# Altium PCB Orin PCB.PcbDoc
Units mil, origin at the board's own origin, x right, y up, seen from the top; angles counter-clockwise.
Board outline 2559.06 x 1811.42 mil, 2 copper layers (Top Layer, Bottom Layer); 20 components, 17 nets, 112 pads, 12 vias.
Unrouted connection lines stored in the file: 6.
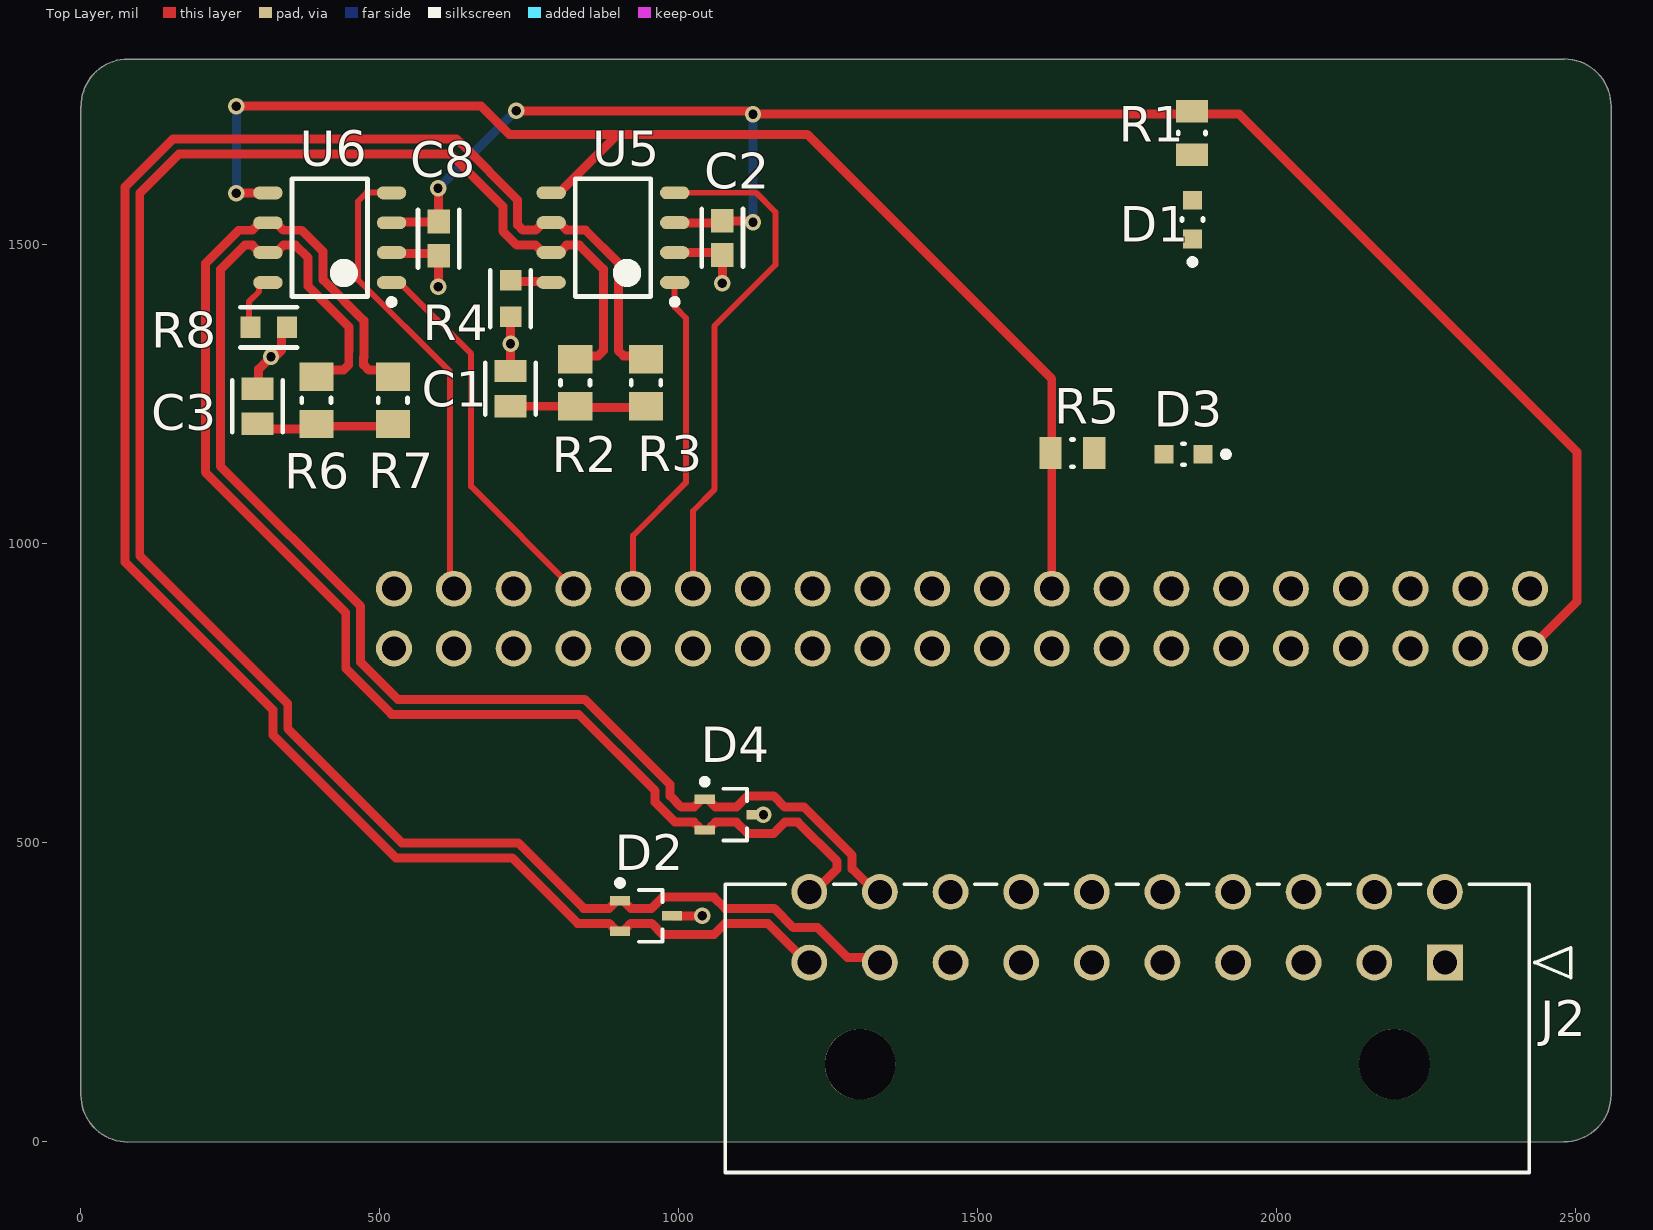
[diagram p0: Top Layer view]
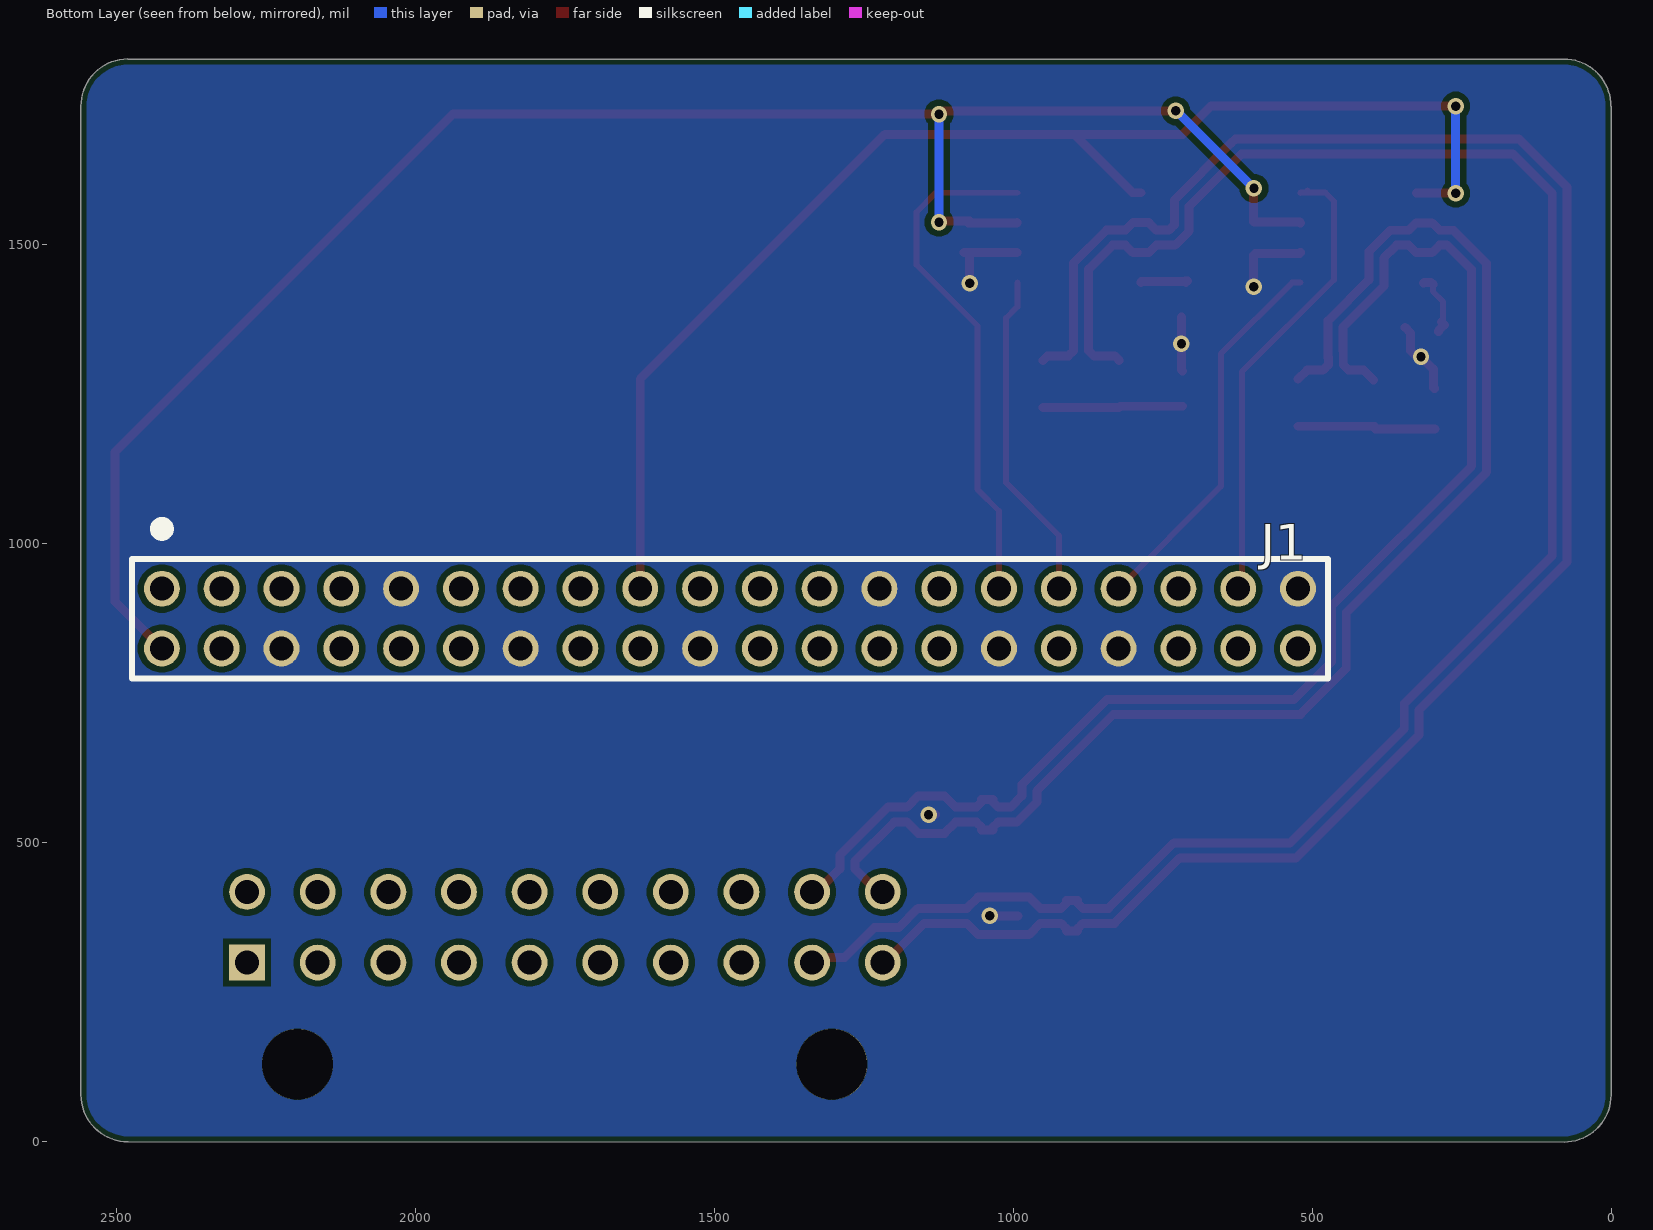
[diagram p1: Bottom Layer view, seen from below]
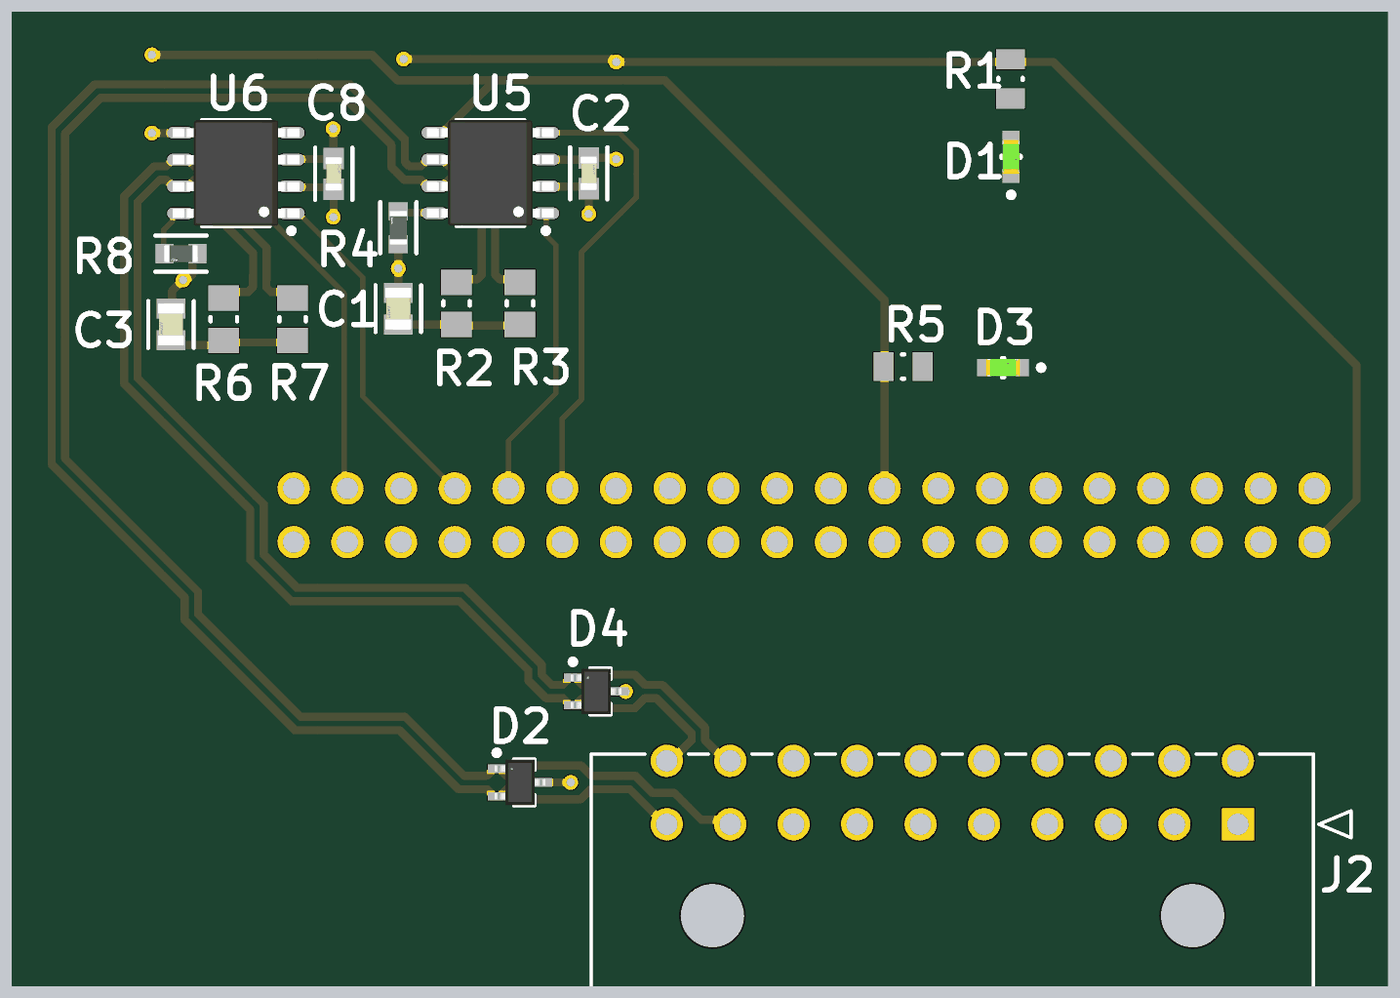
[diagram p2: 3D render of the assembled board from above, using the file's embedded part models]

## Layer stack, top to bottom
Top Solder: solder mask 0.4, Solder Resist, Dk 3.5
Top Layer: signal copper 1.4
Dielectric 1: dielectric 12.6, FR-4, Dk 4.8
Bottom Layer: signal copper 1.4
Bottom Solder: solder mask 0.4, Solder Resist, Dk 3.5

## Board outline
78.52,-0.22 cw(c78.74,78.52) 0,78.74 0,1732.1 0.18,1732.1 cw(c78.92,1732.28) 78.74,1811.02 2480.68,1811.02 2480.68,1811.2 cw(c2480.25,1732.46) 2558.99,1732.04 2559.05,1732.04 2559.06,78.74 cw(c2480.32,78.96) 2480.1,0.22 2480.1,0

## Design rules (kind name [scope] priority, off if disabled: settings)
Clearance Keepout [IsKeepOut] p1: gap=0 ignorepadtopadclearanceinfootprint=FALSE
Clearance [All] p2: gap=10 ignorepadtopadclearanceinfootprint=FALSE except(0: Arc-Text Track-Text SMDPad-Hole THPad-Hole Via-Text Via-Hole Fill-Text Fill-Hole Poly-Text Poly-Hole Region-Text Region-Hole Text-Text Text-Hole; 5: Arc-Arc Arc-Track Track-Track SMDPad-SMDPad SMDPad-Fill SMDPad-Poly SMDPad-Region; 5.91: SMDPad-Text THPad-Text; 7.87: Arc-SMDPad Track-SMDPad; 12.99: Arc-Hole Track-Hole; 19.68: THPad-THPad)
DiffPairsRouting [All] p1: maxlimit=10 minlimit=10 mostfreqgap=10 toplayer_minwidth=15 toplayer_maxwidth=15 toplayer_prefwidth=15 bottomlayer_minwidth=15 bottomlayer_maxwidth=15 bottomlayer_prefwidth=15 maxuncoupledlength=500
DiffPairsRouting CAN [InDifferentialPairClass('CAN')] p2: maxlimit=15 minlimit=15 mostfreqgap=15 toplayer_minwidth=10 toplayer_maxwidth=10 toplayer_prefwidth=10 bottomlayer_minwidth=10 bottomlayer_maxwidth=10 bottomlayer_prefwidth=10 maxuncoupledlength=500
HoleSize [All] p1: absolutevalues=TRUE maxlimit=248.03 minlimit=11.81 maxpercent=80.000 minpercent=20.000
HoleToHoleClearance [All] p1: gap=19.68 allowstackedmicrovias=TRUE
MatchedLengths [InDifferentialPair('CAN')] p1: tolerance=1000 checknetsindiffpair=TRUE checkdiffpairvsdiffpair=FALSE checkxsignals=FALSE checkothers=FALSE
MinimumAnnularRing [All] p1: minimumring=5.12
MinimumSolderMaskSliver [All] p1: minsoldermaskwidth=3.94
PlaneConnect [All] p1: planeconnectstyle=Direct reliefexpansion=20 reliefentries=4 reliefconductorwidth=10 reliefairgap=10
PolygonConnect [All] p1: connectstyle=Direct reliefconductorwidth=50 reliefentries=4 polygonreliefangle="90 Angle" airgapwidth=10
RoutingVias [All] p1: holewidth=15.75 width=27.56 viastyle="Through Hole" minholewidth=11.81 minwidth=19.68 maxholewidth=28 maxwidth=50
SilkToSilkClearance [All] p1: silktosilkclearance=5.91
SilkToSolderMaskClearance [IsPad] p1: minsilkscreentomaskgap=5.91 clearancetoexposedcopper=TRUE
SolderMaskExpansion [All] p1: expansion=1.97 istentingtop=FALSE
SupplyNets "Schematic Supply Nets_3" [InNet('3V3_ORIN')] p1: voltage=0.000
SupplyNets "Schematic Supply Nets_2" [InNet('GND')] p2: voltage=0.000
SupplyNets "Schematic Supply Nets" [InNet('5V_ORIN')] p3: voltage=0.000
UnRoutedNet [All] p1: checkbadconnections=TRUE
Width [All] p1: maxlimit=3937.01 minlimit=5 preferedwidth=10
22 further rules are at their usual default settings.

## Classes and differential pairs
differential pair class CAN2: CAN2
differential pair class CAN1: CAN1
differential pair CAN2: +CAN2_P -CAN2_N
differential pair CAN1: +CAN1_P -CAN1_N

## Components (designator, comment, footprint, x,y, rotation, side; value= is the part's Value field where it differs from the comment)
C1 "C0805C102K5RACTU" FP-C0805C-DN-MFG 718.5,1259.84 r90 top value=1nF
C2 "C0603C104K5RACAUTO" FP-C0603C-CF-IPC_B 1072.83,1511.81 r270 top value=100nF
C3 "C0805C102K5RACTU" FP-C0805C-DN-MFG 295.28,1230.32 r90 top value=1nF
C8 "C0603C104K5RACAUTO" FP-C0603C-CF-IPC_B 598.24,1510.79 r270 top value=100nF
D1 "APT1608ZGCK" FP-APT1608ZGCK-MFG 1859,1542.48 r90 top
D2 "ESD2CAN24DCKRQ1" SOT65P210X110-3N 944.88,377.95 r0 top
D3 "APT1608ZGCK" FP-APT1608ZGCK-MFG 1844,1150 r180 top
D4 "ESD2CAN24DCKRQ1" SOT65P210X110-3N 1086.61,547.24 r0 top
J1 "ESQ-120-48-G-D-LL" ESQ-120-48-G-D-LL-Footprint-1 1523.62,825.2 r180 bottom
J2 "430452000" CON_430452000_MOL 2281.1,300 r0 top
R1 "RC0805JR-7W220RL" RESC2012X06N 1858,1687.42 r270 top value=220R
R2 "RC0805FR-0760R4L" RESC2013X60X35ML10T20 826.77,1269.68 r90 top value=60R
R3 "RC0805FR-0760R4L" RESC2013X60X35ML10T20 944.88,1269.68 r270 top value=60R
R4 "RC0603FR-0710KL" FP-RC0603-0_55-IPC_B 718.5,1410.43 r90 top
R5 "RC0805JR-7W220RL" RESC2012X06N 1658,1152 r0 top value=220R
R6 "RC0805FR-0760R4L" RESC2013X60X35ML10T20 393.7,1240.16 r90 top value=60R
R7 "RC0805FR-0760R4L" RESC2013X60X35ML10T20 521.65,1240.16 r270 top value=60R
R8 "RC0603FR-0710KL" FP-RC0603-0_55-IPC_B 313.98,1362.2 r180 top
U5 "TJA1051T/3,118" NXP-SOIC-8_L 889.76,1512.37 r180 top
U6 "TJA1051T/3,118" NXP-SOIC-8_L 416.15,1512.17 r180 top

## Footprints (in the part's own frame and the unit in brackets; to place one, negate y for a bottom-side part, rotate by r counter-clockwise, add the part's x,y. Pads: shape width x height; smd on the part's side, far side on the other; paste and mask are expansions set on the pad)
CON_430452000_MOL [mm]
  rect 1.52x1.52 / inner round 1.524 / far side rect 1.52x1.52 hole 1.02 paste-2539.97 mask+0.076: 1(0,0)
  round 1.52 / inner round 1.524 / far side round 1.52 hole 1.02 paste-2539.97 mask+0.076: 2(-3,0) 3(-6,0) 4(-9,0) 5(-12,0) 6(-15,0) 7(-18,0) 8(-21,0) 9(-24,0) 10(-27,0) 11(0,3) 12(-3,3) 13(-6,3) 14(-9,3) 15(-12,3) 16(-15,3) 17(-18,3) 18(-21,3) 19(-24,3) 20(-27,3)
  round 3 / inner round 1.524 / far side round 3 hole 3 unplated paste-2539.97 mask+0.076: M1(-2.14,-4.32) M2(-24.84,-4.32)
  silkscreen extent -30.57,-8.92 5.35,3.32
ESQ-120-48-G-D-LL-Footprint-1 [mil]
  round 60 hole 40: 1(-900,100) 2(-900,0) 3(-800,100) 4(-800,0) 5(-700,100) 6(-700,0) 7(-600,100) 8(-600,0) 9(-500,100) 10(-500,0) 11(-400,100) 12(-400,0) 13(-300,100) 14(-300,0) 15(-200,100) 16(-200,0) 17(-100,100) 18(-100,0) 19(0,100) 20(0,0) 21(100,100) 22(100,0) 23(200,100) 24(200,0) 25(300,100) 26(300,0) 27(400,100) 28(400,0) 29(500,100) 30(500,0) 31(600,100) 32(600,0) 33(700,100) 34(700,0) 35(800,100) 36(800,0) 37(900,100) 38(900,0) 39(1000,100) 40(1000,0)
  silkscreen extent -950,-50 1050,210
FP-APT1608ZGCK-MFG [mm]
  rect 0.8x0.8 smd paste+0 mask+0: 1(-0.825,0) 2(0.825,0)
  silkscreen extent -1.92,-0.45 0.05,0.45, body extent -1.33,-0.55 1.33,0.55, height 0.25
FP-C0603C-CF-IPC_B [mil]
  rect 39.63x37.73 smd paste+0 mask+0: 1(-28.58,0) 2(28.58,0)
  silkscreen extent -48,-35 48,35, body extent -58,-29 58,29, height 10
FP-C0805C-DN-MFG [mm]
  rect 0.95x1.35 smd paste+0 mask+0: 1(-0.75,0) 2(0.75,0)
  silkscreen extent -1.1,-1.07 1.1,1.07, body extent -1.4,-0.85 1.4,0.85, height 0.25
FP-RC0603-0_55-IPC_B [mil]
  rect 33.81x35.91 smd paste+0 mask+0: 1(-30.58,0) 2(30.58,0)
  silkscreen extent -47,-34 47,34, body extent -57,-28 57,28, height 10
NXP-SOIC-8_L [mm] "SOIC, 8-Leads, Body 5x4mm, Pitch 1.27mm, IPC High Density"
  oval 1.25x0.55 smd: 1(-2.625,1.905) 2(-2.625,0.635) 3(-2.625,-0.635) 4(-2.625,-1.905) 5(2.625,-1.905) 6(2.625,-0.635) 7(2.625,0.635) 8(2.625,1.905)
  silkscreen extent -2.75,-2.5 1.6,2.85, body extent -3,-2.5 3,2.5, height 1.75
RESC2012X06N [mm] "Chip Resistor, 2-Leads, Body 2.00x1.25mm, IPC Medium Density"
  rect 0.95x1.35 smd: 1(-0.925,0) 2(0.925,0)
  silkscreen extent -0.05,-0.58 0.05,0.58, body extent -1.05,-0.67 1.05,0.67, height 0.6
RESC2013X60X35ML10T20 [mm] "Chip Resistor, 2-Leads, Body 2.00x1.25mm, IPC Low Density"
  rect 1.2x1.45 smd: 1(-1,0) 2(1,0)
  silkscreen extent -0.1,-0.63 0.1,0.63, body extent -1.05,-0.67 1.05,0.67, height 0.6
SOT65P210X110-3N [mm] "SOT23, 3-Leads, Body 2.00x2.10mm, Pitch 0.65mm, IPC Medium Density"
  rect 0.85x0.4 smd: 1(-1.1,0.65) 2(-1.1,-0.65) 3(1.1,0)
  silkscreen extent -1.22,-1.1 0.7,1.52, body extent -1.19,-1.08 1.19,1.08, height 1.09

## Part data
C1 C3: library part CMP-2007-01097-2, "CAP CER 1000PF 50V X7R 0805", Capacitance="1,000 pF", Manufacturer=KEMET, Package=C0805C-DN, Temperature="-55°C to +125°C", Temperature Characteristic=X7R, Temperature Coefficient=30ppm/°C, Temperature Range High=+125°C, Temperature Range Low=-55°C, Tolerance=0.1, Voltage Rating="50 V", Automotive=No, Category=Cap, ComponentLink2Description=Datasheet, ComponentLink2URL=https://content.kemet.com/datasheets/KEM_C1003_C0G_SMD.pdf, Device Class L1="Passive Components", Device Class L2=Capacitors, Device Class L3="Ceramic Capacitors", Digikey Description="CAP CER 1000PF 50V X7R 0805", Height=0.88mm, Ipc Land Pattern Name=CAPC200125X78, Lead Free=Yes, Manufacturer Part Number=C0805C102K5RACTU, Material=Ceramic, Mouser Description="Cap Ceramic 0.001uF 50V X7R 10% SMD 0805 125C Plastic T/R", Octopart=https://octopart.com/c0805c102k5ractu-kemet-93010, RoHS=TRUE
C2 C8: library part CMP-2006-03060-2, "CAP CER 0.1UF 50V X7R 0603", Capacitance="0.10 μF", Manufacturer=KEMET, Package=C0603C-CF, Temperature="-55°C to +125°C", Temperature Characteristic=X7R, Temperature Coefficient=30ppm/°C, Temperature Range High=+125°C, Temperature Range Low=-55°C, Tolerance=0.1, Voltage Rating="50 V", Automotive=Yes, Automotive Grade="Grade 1", Category=Cap, ComponentLink2Description=Datasheet, ComponentLink2URL=https://api.kemet.com/component-edge/download/datasheet/C0603C100J5GACAUTO.pdf, Device Class L1="Passive Components", Device Class L2=Capacitors, Device Class L3="Ceramic Capacitors", Digikey Description="CAP CER 0.1UF 50V X7R 0603", Height=0.87mm, Lead Free=Yes, Manufacturer Part Number=C0603C104K5RACAUTO, Material=Ceramic, Mouser Description="Multilayer Ceramic Capacitors MLCC - SMD/SMT 0.1uF 50volts 10% X7R AUTO", Octopart=https://octopart.com/c0603c104k5racauto-kemet-12563741, RoHS=TRUE
D1 D3: library part CMP-44529-000024-1, "LED GREEN CLEAR CHIP SMD", Case Code (Imperial)=0603, Case Code (Metric)=1608, Color=Green, Forward Current=20mA, Forward Voltage=3.3V, Lens Color=Colorless, Max Operating Temperature=85°C, Min Operating Temperature=-40°C, Package Quantity=1, Case/Package=0603, Dominant Wavelength=525nm, Height=0.75mm, Illumination Color=Green, Lead Free="Lead Free", Length=1.6mm, Lens Transparency=Clear, Luminous Intensity=350mcd, Mount="Surface Mount", Packaging="Tape and Reel", Test Current=20mA, Viewing Angle=120°, Width=0.8mm
D2 D4: library part CMP-004-00032-2, "Automotive, dual, 3-pF, ±24-V, ±30-kV ESD protection diode for CAN and in-vehicle networks 3-SC70 -55 to 150"
J1: library part CMP-002-00083-4, "Board Connector, 40 Contact(s), 2 Row(s), Female, Straight, 0.1 inch Pitch, Solder Kinked Leads Terminal, Locking, Black Insulator, Plug"
J2: "No Description Available", Mfr_Name="Molex Connector Corporation", RefDes=RefDes, Type=Type
R1 R5: library part CMP-009-00188-1, "General Purpose Chip Resistor Thick Film 0805 220Ohm 5% Paper T/R"
R2 R3 R6 R7: library part CMP-2001-01223-1, Manufacturer=Yageo, Part Number=RC0805FR-0760R4L
R4 R8: library part CMP-2100-03664-2, "RES 10K OHM 1% 1/10W 0603", Case Code (Imperial)=0603, Case Code (Metric)=1608, Max Operating Temperature=155°C, Max Power Dissipation=100mW, Min Operating Temperature=-55°C, Resistance=10k, Resistance Tolerance=1%, Resistor Type="Thick Film", Temperature Coefficient=100ppm/°C, Voltage Rating=75V, Voltage Rating (DC)=50V, Case/Package=0603, Construction=Rectangular, Depth=0.8mm, Features="Moisture Resistant", Height=0.45mm, Lead Free="Lead Free", Lead Pitch=0.3mm, Length=1.6mm, Military Standard=Not, Number of Pins=2, Number of Terminations=2, Packaging="Tape and Reel", Power Rating=100mW, RoHS Compliant=Yes, Series=RC, Size Code=0603, Termination=SMD/SMT, Tolerance=1%, Weight=7.1E-05oz, Width=0.8mm
U5 U6: library part CMP-2000-07245-1, "High-Speed CAN Transceiver, 3 to 5 V, 8-Pin SOIC (SOT96-1), RoHS, Tape and Reel", Manufacturer=NXP, Operating Supply Voltage (Max)=5.5V, Operating Supply Voltage (Min)=4.5V, Operating Supply Voltage (Typ)=5V, Operating Temperature (Max)=125C, Operating Temperature (Min)=-40C, Operating Temperature Classification=Automotive, Package Description="8-Pin Small Outline Integrated Circuit, Body 4.9 x 3.9 mm, Pitch 1.27 mm", Package Reference=SOT96-1, Package Type=SO, Power Down Mode=Normal/Silent, Supply Current=70mA, Category=Transceiver, Data Rate=1Mbps, Datasheet URL=http://www.nxp.com/documents/data_sheet/TJA1051.pdf, Datasheet Version="Rev. 7, 01/2015", DELETED=Compliant, Manufacturer URL=http://www.nxp.com/, Mounting=SurfaceMount, Mounting Technology=SurfaceMount, Number of Transceivers=1, Packaging=TapeandReel, Pin Count=8, Rad Hardened=No, Standard Supported=ISO11898-2

## Via types
v1: diameter 27.56, hole 15.75, Top Layer to Bottom Layer, 12 vias

## Nets (pads, with @x,y where several pads share a name; then routed paths per layer and width w, separated by ;. In a path a pad name is that pad's centre, name@x,y a point inside that pad or via, vN(x,y) a via of type N, cw(c..) or ccw(c..) an arc to the next point about the centre after c; other vN are vias at no path point)
3V3_ORIN: J1.1 J1.17 R5.1 U5.5 U6.5 | length 2260
  Top Layer w15: v1(259.84,1586.61) U6.5@325.35,1586.61 ; v1(259.84,1732.28) 669.29,1732.28 716.54,1685.04 897.87,1685.04 ; U5.5 800.2,1587.37 897.87,1685.04 ; J1.17@1624,932 1623.62,932.38 1623.62,1275.98 1214.57,1685.04 897.87,1685.04
  Bottom Layer w15: v1(259.84,1586.61) v1(259.84,1732.28)
5V_ORIN: C2.1 C8.1 J1.2 J1.4 R1.1 U5.3 U6.3 | length 3018
  Top Layer w15: U6.3 520.6,1538.27 C8.1@597.14,1538.27 ; v1@597.25,1591.58 v1(597.25,1594.84) 597.75,1594.35 597.75,1539.86 C8.1 ; v1@728.64,1724.7 v1(728.35,1724.41) 1115.19,1724.41 1118.6,1721 v1@1124,1721 ; U5.3 993.57,1536.91 C2.1@1074.8,1536.91 ; C2.1 1121.61,1540.39 v1(1124,1538) ; v1@1122,1723 v1@1124,1721 ; v1(1124,1719) v1@1124,1721 ; v1@1124,1721.11 v1@1124,1721 ; v1@1125,1721 v1@1124,1721 ; J1.2 2502,903.57 2502,1154 1937,1719 1126,1719 v1@1124,1721
  Bottom Layer w15: v1(597.25,1594.84) 598.02,1594.84 727.58,1724.41 v1(728.35,1724.41) v1@725.94,1722.01 ; v1(1124,1538) v1(1124,1719)
CAN1_N: D2.2 J2.10 R3.1 U5.6 | length 3288.2
  Top Layer w15: R3.1@949.8,1307.09 942.41,1314.48 907.61,1314.48 898.82,1323.27 898.82,1469.93 843.88,1524.87 812.31,1524.87 799.81,1537.37 U5.6 773.02,1537.37 760.52,1524.87 739.31,1524.87 730.52,1533.65 730.52,1575.11 635.79,1669.84 628.47,1677.17 153.62,1677.17 73.43,1596.97 73.43,969.96 320.91,722.48 320.91,680.63 526.53,475 720.99,475 830.54,365.45 883.56,365.45 892.34,356.67 892.34,352.74 892.72,352.36 D2.2 910.43,352.36 910.81,352.74 910.81,356.67 919.59,365.45 954.34,365.45 973.12,346.67 1058.58,346.67 1077.36,365.45 1148.9,365.45 1205.77,308.58 1209.53,308.58 J2.10
CAN1_P: D2.1 J2.9 R2.2 U5.7 | length 3292.4
  Top Layer w15: R2.2@822.83,1307.09 830.23,1314.48 865.03,1314.48 873.82,1323.27 873.82,1459.57 833.52,1499.87 812.31,1499.87 799.81,1487.37 U5.7 773.02,1487.37 760.52,1499.87 728.96,1499.87 705.52,1523.3 705.52,1564.75 618.11,1652.17 163.98,1652.17 98.43,1586.61 98.43,980.32 338.58,740.16 345.91,732.84 345.91,690.98 536.89,500 731.35,500 840.9,390.45 883.56,390.45 892.34,399.24 892.34,403.17 892.72,403.54 D2.1 910.43,403.54 910.81,403.17 910.81,399.24 919.59,390.45 954.34,390.45 973.12,409.23 1058.58,409.23 1077.36,390.45 1159.25,390.45 1191.44,358.27 1232.28,358.27 1281.97,308.58 1327.64,308.58 J2.9
CAN1_RX: J1.29 U5.4 | length 868
  Top Layer w10: U5.4 1129.17,1587.37 1161.42,1555.12 1161.42,1466.54 1059.35,1364.47 1059.35,1090.85 1023.62,1055.12 1023.62,926.38 J1.29@1024,926
CAN1_TX: J1.31 U5.1 | length 556.4
  Top Layer w10: J1.31 923.62,1014.17 1011.81,1102.36 1011.81,1377.95 993.11,1396.65 U5.1
CAN2_N: D4.2 J2.20 R7.1 U6.6 | length 2369.9
  Top Layer w15: R7.1@523.62,1275.59 508.48,1290.73 481.71,1290.73 472.93,1299.52 472.93,1311.94 473.13,1312.15 473.13,1373.54 404.92,1441.75 404.92,1488.74 368.99,1524.67 338.7,1524.67 326.2,1537.17 U6.6 299.41,1537.17 286.91,1524.67 263.92,1524.67 208.27,1469.02 208.27,1119.96 442.91,885.31 442.91,791.81 519.57,715.16 832.16,715.16 960.29,587.04 960.29,568.18 993.72,534.74 1025.29,534.74 1034.07,525.96 1034.07,522.03 1034.45,521.65 D4.2 1052.17,521.65 1052.54,522.03 1052.54,525.96 1061.33,534.74 1096.07,534.74 1114.85,515.96 1158.39,515.96 1177.17,534.74 1198.94,534.74 1264.67,469.02 1264.67,456.6 1226.18,418.11 J2.20
CAN2_P: D4.1 J2.19 R6.2 U6.7 | length 2287.1
  Top Layer w15: R6.2@397.64,1274.61 413.76,1290.73 439.14,1290.73 447.93,1299.52 447.93,1322.3 448.13,1322.5 448.13,1363.19 379.92,1431.4 379.92,1478.38 358.63,1499.67 338.7,1499.67 326.2,1487.17 U6.7 299.41,1487.17 286.91,1499.67 274.27,1499.67 233.27,1458.66 233.27,1130.32 467.91,895.67 467.91,802.17 529.92,740.16 842.52,740.16 985.29,597.39 985.29,578.53 1004.07,559.74 1025.29,559.74 1034.07,568.53 1034.07,572.46 1034.45,572.83 D4.1 1052.17,572.83 1052.54,572.46 1052.54,568.53 1061.33,559.74 1096.07,559.74 1114.85,578.52 1158.39,578.52 1177.17,559.74 1209.3,559.74 1289.67,479.38 1289.67,456.6 1328.15,418.11 J2.19
CAN2_RX: J1.37 U6.4 | length 778.9
  Top Layer w10: U6.4@505.98,1589.4 U6.4@507.69,1591.1 ; U6.4 519.24,1587.43 477.66,1587.43 463.4,1573.17 463.4,1441.81 617.4,1287.81 617.4,931.42 J1.37
CAN2_TX: J1.33 U6.1 | length 646
  Top Layer w10: U6.1 533.28,1437.17 652.56,1317.89 652.56,1096.26 J1.33
GND: C1.2 C2.2 C3.2 C8.2 D1.1 D2.3 D3.1 D4.3 J1.6 J1.9 J1.14 J1.20 J1.25 J1.30 J1.34 J1.39 R4.1 R8.1 U5.2 U6.2 | length 532.5
  Top Layer w15: C3.2 297.18,1261.74 297.18,1292.26 v1(317.91,1312.99) ; v1@326.77,1314.96 335.15,1323.34 335.15,1352.8 R8.1 ; U6.2 520.77,1485.89 C8.2@594.56,1485.89 ; v1(597.46,1430.14) 598.24,1430.92 C8.2 ; C1.2@716.54,1289.37 718.5,1291.34 v1(718.5,1334.65) R4.1 ; D2.3@992.13,377.95 v1(1039.37,377.95) ; U5.2 993.21,1487.27 C2.2@1082.58,1487.27 ; v1(1072.83,1436.02) C2.2 ; D4.3 v1(1141.49,547.24) ; J1.25 J1.25@1224.02,925.59
NetC1_1: C1.1 R2.1 R3.2 | length 234.1
  Top Layer w15: C1.1@716.54,1230.31 820.87,1230.31 822.83,1228.35 R3.2@949.8,1228.35
NetC3_1: C3.1 R6.1 R7.2 | length 234.3
  Top Layer w15: C3.1@294.29,1191.93 393.7,1191.93 R6.1@397.64,1195.87 ; R6.1@394.68,1195.87 395.67,1196.85 R7.2@523.62,1196.85
NetD1_2: D1.2 R1.2
NetD3_2: D3.2 R5.2
SILENT1: R4.2 U5.8 | length 78.7
  Top Layer w15: R4.2@708.66,1440.03 R4.2@711.32,1437.37 ; R4.2@712.6,1440.03 713.99,1438.64 785.14,1438.64 U5.8
SILENT2: R8.2 U6.8 | length 112.3
  Top Layer w10: R8.2@281.43,1368.04 281.43,1405.79 297.75,1422.12 U6.8@297.75,1434.09
  Top Layer w15: R8.2@283.4,1371 278.74,1366.34 288.71,1356.37 R8.2@288.71,1355.32 ; U6.8@297.75,1434.09 300.83,1437.17 U6.8 U6.8@313.79,1436.18
pads on no net: J1.3 J1.5 J1.7 J1.8 J1.10 J1.11 J1.12 J1.13 J1.15 J1.16 J1.18 J1.19 J1.21 J1.22 J1.23 J1.24 J1.26 J1.27 J1.28 J1.32 J1.35 J1.36 J1.38 J1.40 J2.1 J2.2 J2.3 J2.4 J2.5 J2.6 J2.7 J2.8 J2.11 J2.12 J2.13 J2.14 J2.15 J2.16 J2.17 J2.18 J2.M1 J2.M2

## Polygon pours and split planes (outlines as drawn)
GND on Bottom Layer "GND_L02_P000" (solid, pour order 0): 78.74,1801.18 ccw(c78.74,1732.28) 9.84,1732.28 9.84,78.74 ccw(c78.74,78.74) 78.74,9.84 2480.32,9.84 ccw(c2480.32,78.74) 2549.21,78.74 2549.21,1732.28 ccw(c2480.32,1732.28) 2480.32,1801.18 2421.26,1801.18

## Silkscreen, mask and mechanical layers (free items; w line width, h text height)
Mechanical 1:
  lines w10: 0,1732.1 0,78.74 ccw(c78.74,78.52) 78.52,-0.22 ; 0.18,1732.1 cw(c78.92,1732.28) 78.74,1811.02 2480.68,1811.02 ; 78.52,0 2480.1,0 ; 2480.1,0.22 ccw(c2480.32,78.96) 2559.06,78.74 2559.05,1732.04 ; 2480.68,1811.2 cw(c2480.25,1732.46) 2558.99,1732.04